# Altium PCB NCS_Wireless_Control_Card.PcbDoc
Units mm, origin at the board's own origin, x right, y up, seen from the top; angles counter-clockwise.
Board outline 68.5 x 80 mm, 2 copper layers (Top Layer, Bottom Layer), stack 1.6 mm thick; 49 components, 58 nets, 207 pads, 27 vias.
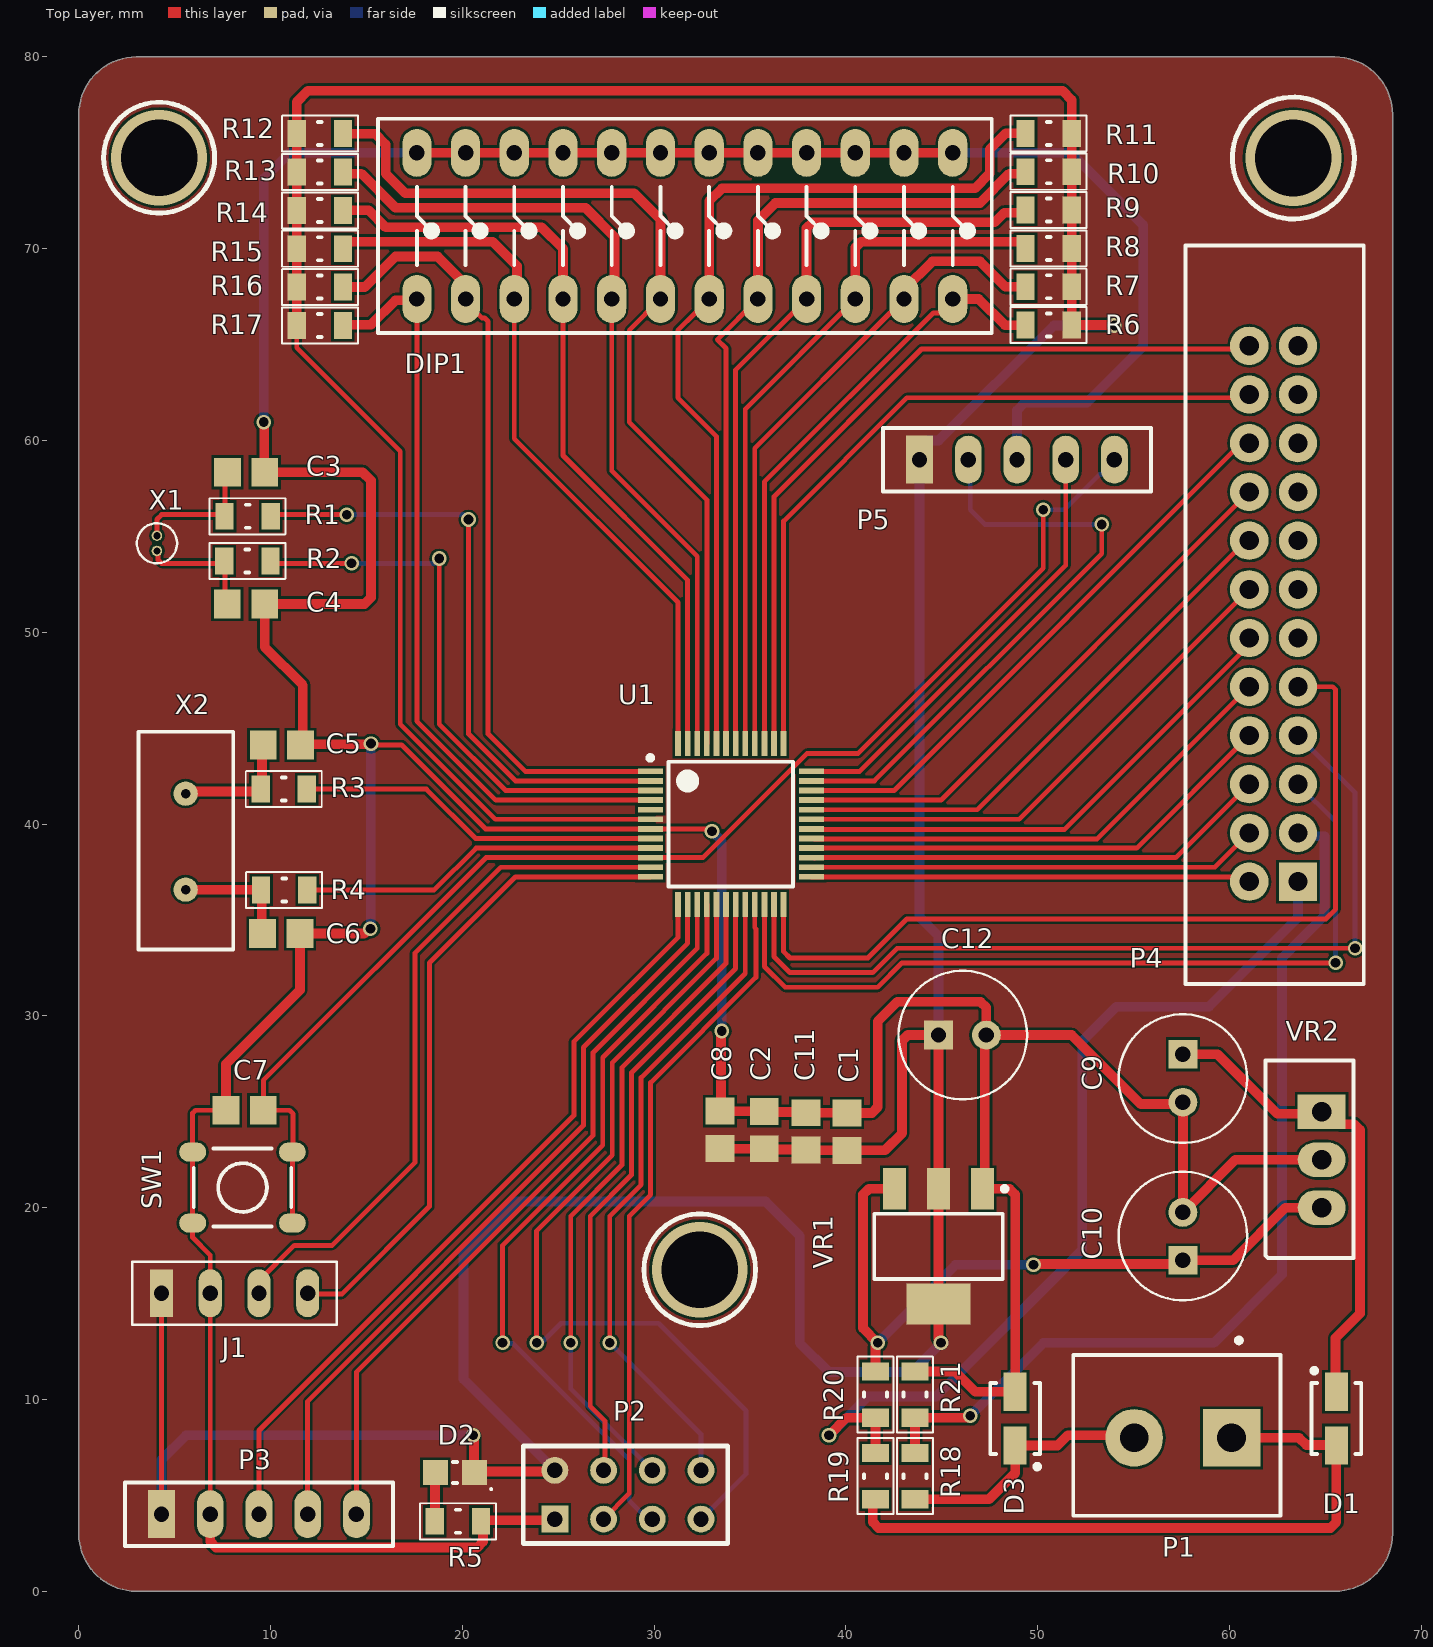
[diagram p0: Top Layer view]
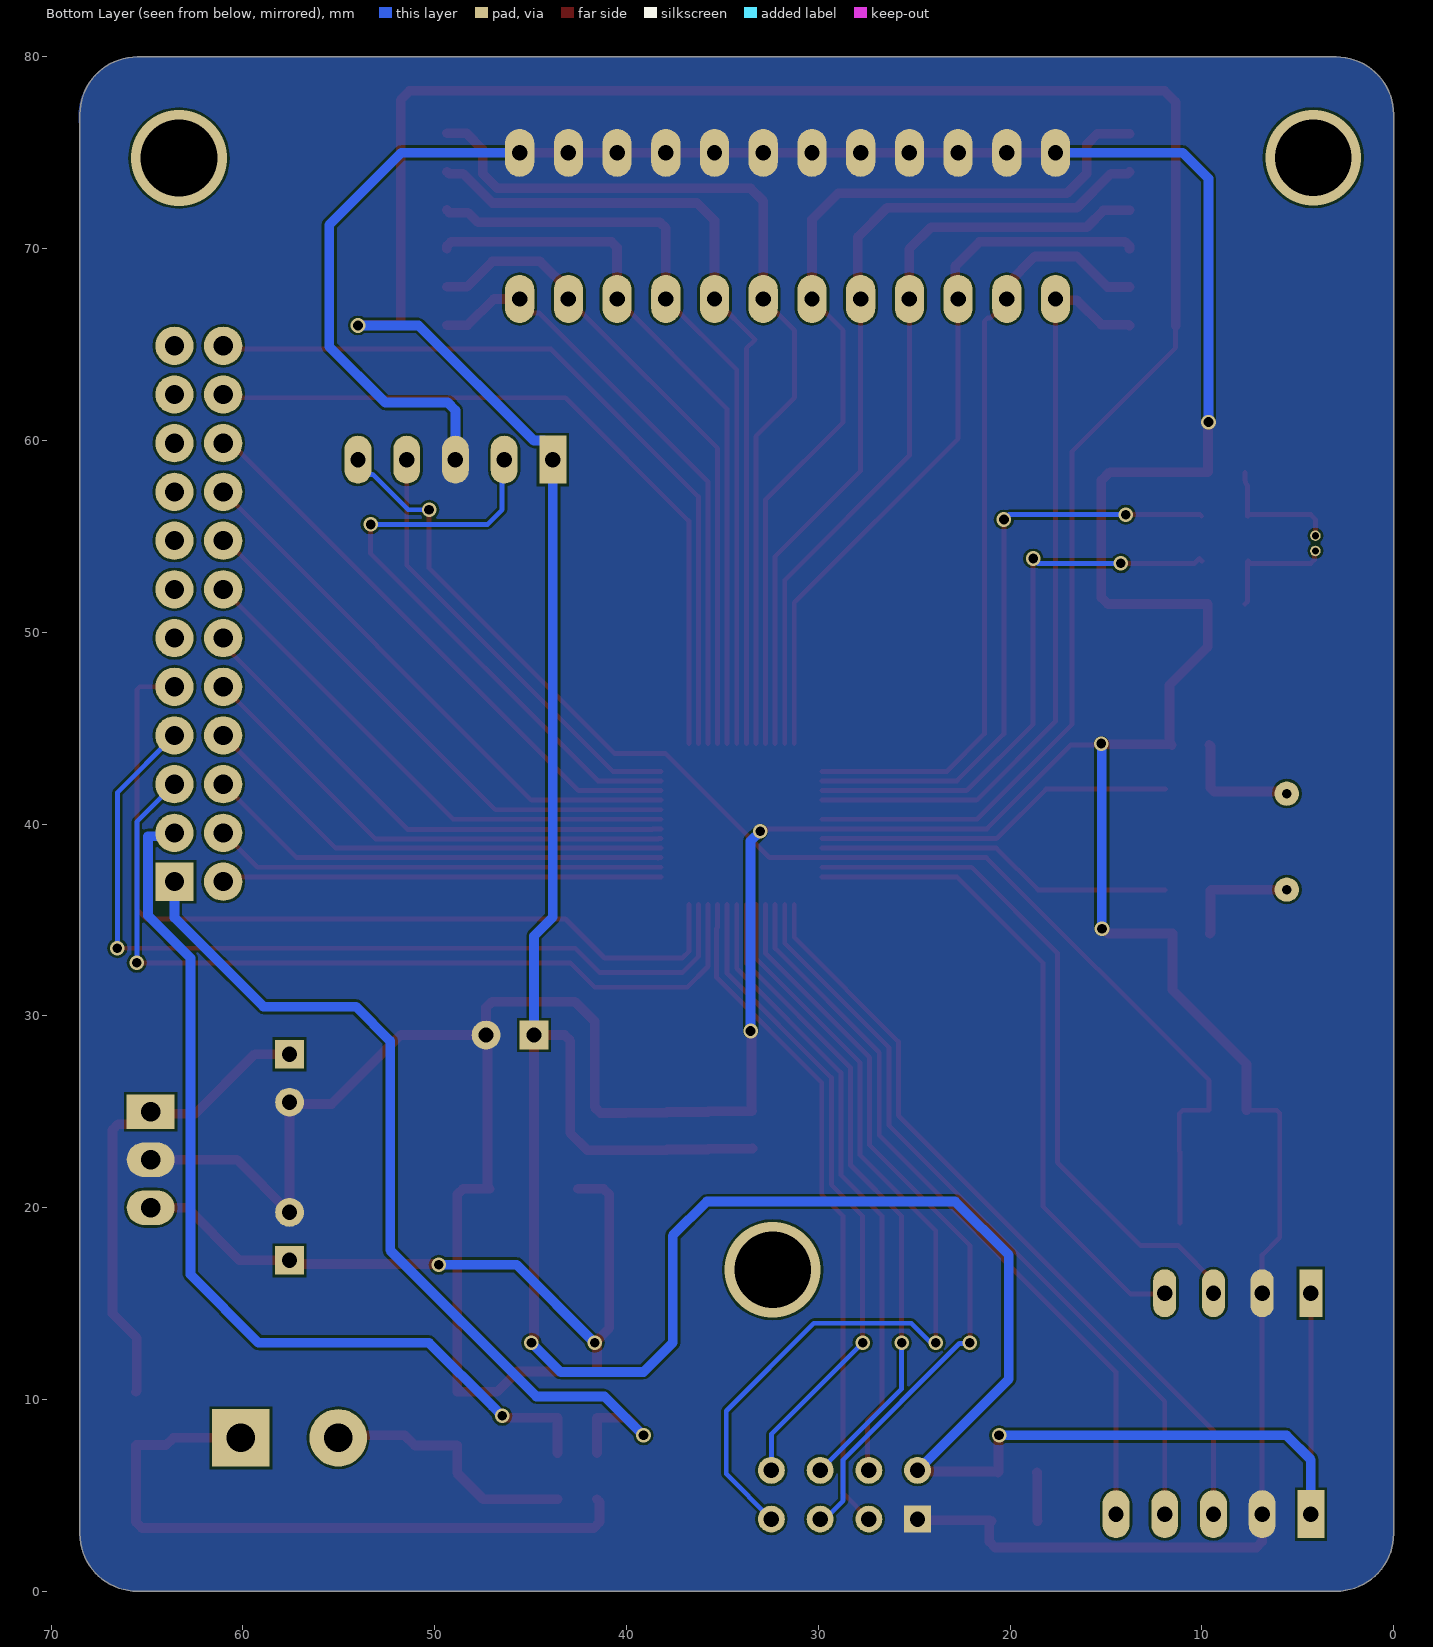
[diagram p1: Bottom Layer view, seen from below]
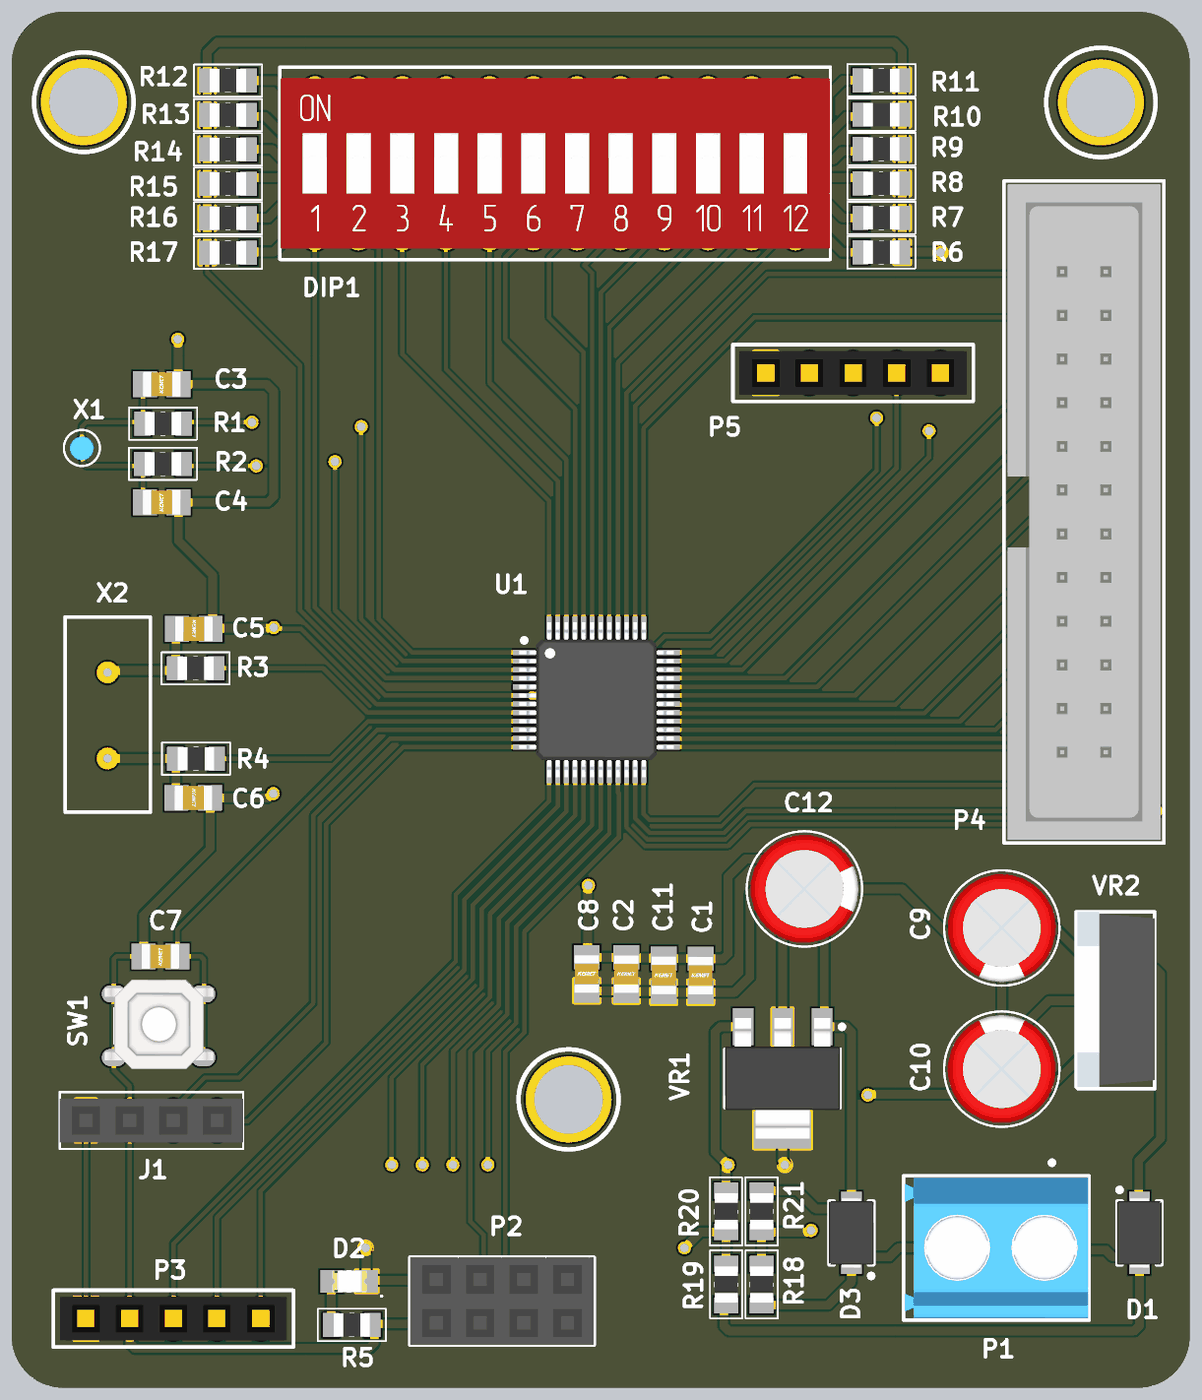
[diagram p2: 3D render of the assembled board from above, using the file's embedded part models]

## Layer stack, top to bottom
Top Solder: solder mask 0.0203, Solder Resist, Dk 3.5
Top Layer: signal copper 0.0508
Dielectric 1: dielectric 1.4986, FR-4, Dk 4.8
Bottom Layer: signal copper 0.0508
Bottom Solder: solder mask 0.0203, Solder Resist, Dk 3.5

## Board outline
0,3 0,77 cw(c3,77) 3,80 65.5,80 cw(c65.5,77) 68.5,77 68.5,3 cw(c65.5,3) 65.5,0 3,0 cw(c3,3)

## Design rules (kind name [scope] priority, off if disabled: settings)
Clearance [All] p1: gap=0.127 ignorepadtopadclearanceinfootprint=FALSE
HoleSize [All] p1: absolutevalues=TRUE maxlimit=100 minlimit=0.025 maxpercent=80.000 minpercent=20.000
MinimumSolderMaskSliver [All] p1: minsoldermaskwidth=0.025
PlaneConnect [All] p1: planeconnectstyle=Direct reliefexpansion=0.508 reliefentries=4 reliefconductorwidth=0.254 reliefairgap=0.254
PolygonConnect [All] p1: connectstyle=Direct reliefconductorwidth=0.254 reliefentries=4 polygonreliefangle="90 Angle" airgapwidth=0.254
RoutingVias [All] p1: holewidth=0.508 width=0.762 viastyle="Through Hole" minholewidth=0.254 minwidth=0.508 maxholewidth=100 maxwidth=100
SilkToSolderMaskClearance [IsPad] p1: minsilkscreentomaskgap=0.051 clearancetoexposedcopper=TRUE
SolderMaskExpansion [All] p1: expansion=0.102 istentingtop=FALSE
Width [All] p1: maxlimit=0.508 minlimit=0.254 preferedwidth=0.254
26 further rules are at their usual default settings.

## Classes and differential pairs
component class NCS_Wireless_Control_Card_Power_dis_conn: C8 C9 C10 C11 C12 D1 D2 D3 J1 P1 P2 R5 VR1 VR2
component class NCS_Wireless_Control_Card_MCU: C1 C2 C3 C4 C5 C6 C7 R1 R2 R3 R4 SW1 U1 X1 X2
component class NCS_Wireless_Control_Card_hc12_display_conn: DIP1 P3 P5 R6 R7 R8 R9 R10 R11 R12 R13 R14 R15 R16 R17
component class NCS_Wireless_Control_Card_Display_Connector: P4 R18 R19 R20 R21

## Components (designator, comment, footprint, x,y, rotation, side; value= is the part's Value field where it differs from the comment)
C1 "4.7uF" C0805C209D3HACTU_2pF 40.058,23.964 r270 top
C2 "100nF" C0805C104K3RACTU_100nF 35.74,24.044 r270 top
C3 "22pF" C0805C209D3HACTU_2pF 8.724,58.346 r0 top
C4 "22pF" C0805C209D3HACTU_2pF 8.72,51.48 r0 top
C5 "22pF" C0805C209D3HACTU_2pF 10.592,44.124 r180 top
C6 "22pF" C0805C209D3HACTU_2pF 10.56,34.296 r180 top
C7 "100nF" C0805C104K3RACTU_100nF 8.648,25.078 r0 top
C8 "4.7uF" C0805C209D3HACTU_2pF 33.436,24.058 r270 top
C9 "100uF 25V TH" "100uF 25V TH" 57.57,28 r270 top
C10 "220uF 25V TH" "100uF 25V TH" 57.57,17.254 r90 top
C11 "104pF" C0805C471K3RACTU_470pF 37.918,23.974 r270 top
C12 "100uF 25V TH" "100uF 25V TH" 44.824,29 r0 top
D1 "Diode" CRS06(TE85L,Q,M)_DIODE 65.57,9 r90 top
D2 "GREEN LED" LTST-C171GKT_GREEN 19.616,6.188 r180 top
D3 "Diode" CRS06(TE85L,Q,M)_DIODE 48.824,9 r270 top
DIP1 "12 DIP" DIP24 45.57,75 r270 top
J1 "1x4 Female Header" "1x4 Female Header" 4.316,15.538 r90 top
P1 "1x2 Connector" "1x2 Connector" 57.57,8 r270 top
P2 "2x4 header" "2x4 header" 24.824,3.762 r90 top
P3 "1x5 Female Header" "1x5 Female Header" 4.316,4.016 r90 top
P4 "2x12 Header" "2x12 header" 63.57,37 r180 top
P5 "1x5 Female Header" "1x5 Female Header" 43.84,59 r90 top
R1 "0R" RC0805FR-7W330RL 8.806,56.048 r0 top value=330R
R2 "0R" RC0805FR-7W330RL 8.792,53.716 r0 top value=330R
R3 "0R" RC0805FR-7W330RL 10.688,41.822 r180 top value=330R
R4 "0R" RC0805FR-7W330RL 10.712,36.57 r180 top value=330R
R5 "330R" RC0805FR-7W330RL 19.77,3.648 r180 top
R6 "4K7" RC0805FR-7W330RL 50.57,66.016 r0 top value=330R
R7 "4K7" RC0805FR-7W330RL 50.57,68.016 r0 top value=330R
R8 "4K7" RC0805FR-7W330RL 50.57,70.016 r0 top value=330R
R9 "4K7" RC0805FR-7W330RL 50.57,72.016 r0 top value=330R
R10 "4K7" RC0805FR-7W330RL 50.57,74.016 r0 top value=330R
R11 "4K7" RC0805FR-7W330RL 50.57,76.016 r0 top value=330R
R12 "4K7" RC0805FR-7W330RL 12.57,76 r180 top value=330R
R13 "4K7" RC0805FR-7W330RL 12.57,74 r180 top value=330R
R14 "4K7" RC0805FR-7W330RL 12.57,72 r180 top value=330R
R15 "4K7" RC0805FR-7W330RL 12.57,70 r180 top value=330R
R16 "4K7" RC0805FR-7W330RL 12.57,68 r180 top value=330R
R17 "4K7" RC0805FR-7W330RL 12.57,66 r180 top value=330R
R18 "0R" RC0805FR-7W330RL 43.602,6 r270 top value=330R
R19 "0R" RC0805FR-7W330RL 41.538,6 r270 top value=330R
R20 "0R" RC0805FR-7W330RL 41.538,10.254 r90 top value=330R
R21 "0R" RC0805FR-7W330RL 43.602,10.254 r90 top value=330R
SW1 "Push Button" "PUSH BUTTON SMD" 8.538,21.048 r0 top
U1 "STM32C031C6T6" STM32C031C6T6-48N 34,40 r0 top
VR1 "3v3 Voltage R" SAMS1117-33-4N 44.824,17.984 r270 top
VR2 "5V Vol Reg" "5V Vol Reg DIP" 64.808,25 r0 top
X1 "32.768Khz" 32.768KHz 4.078,54.24 r90 top
X2 "8Mhz" "8Mhz Crystal" 5.57,36.586 r90 top

## Footprints (in the part's own frame and the unit in brackets; to place one, negate y for a bottom-side part, rotate by r counter-clockwise, add the part's x,y. Pads: shape width x height; smd on the part's side, far side on the other; paste and mask are expansions set on the pad)
"1x2 Connector" [mm]
  rect 3x3 hole 1.5: 1(0,2.54)
  round 3 hole 1.5: 2(0,-2.54)
  silkscreen extent -5.21,-5.72 4.06,5.08, body extent -4.24,-5.63 3.96,5.03, height 10
"1x4 Female Header" [mm]
  rect 2.5x1.2 hole 0.8: 1(0,0)
  oval 2.5x1.2 hole 0.8: 2(0,-2.54) 3(0,-5.08) 4(0,-7.62)
  silkscreen extent -1.65,-9.14 1.65,1.52, body extent -1.27,-9.14 1.27,1.52, height 8.51
"1x5 Female Header" [mm]
  rect 2.5x1.4 hole 0.8: 1(0,0)
  oval 2.5x1.4 hole 0.8: 2(0,-2.54) 3(0,-5.08) 4(0,-7.62) 5(0,-10.16)
  silkscreen extent -1.65,-12.06 1.65,1.91, body extent -1.27,-11.68 1.27,1.52, height 8.5
"2x4 header" [mm]
  rect 1.4x1.4 hole 0.8: 1(0,0)
  round 1.4 hole 0.8: 2(2.54,0) 3(0,-2.54) 4(2.54,-2.54) 5(0,-5.08) 6(2.54,-5.08) 7(0,-7.62) 8(2.54,-7.62)
  silkscreen extent -1.27,-9.02 3.81,1.65, body extent -1.27,-9.02 3.81,1.65, height 8.51
"2x12 header" [mm]
  rect 2x2 hole 1: 1(0,0)
  round 2 hole 1: 2(0,-2.54) 3(0,-5.08) 4(0,-7.62) 5(0,-10.16) 6(0,-12.7) 7(0,-15.24) 8(0,-17.78) 9(0,-20.32) 10(0,-22.86) 11(0,-25.4) 12(0,-27.94) 13(2.54,-27.94) 14(2.54,-25.4) 15(2.54,-22.86) 16(2.54,-20.32) 17(2.54,-17.78) 18(2.54,-15.24) 19(2.54,-12.7) 20(2.54,-10.16) 21(2.54,-7.62) 22(2.54,-5.08) 23(2.54,-2.54) 24(2.54,0)
  silkscreen extent -3.43,-33.17 5.87,5.33, body extent -3.23,-32.97 5.66,5.13, height 8.63
"5V Vol Reg DIP" [mm]
  rect 2.5x1.8 hole 1: 1(0,0)
  oval 2.5x1.8 hole 1: 2(0,-2.5) 3(0,-5)
  silkscreen extent -2.92,-7.62 1.65,2.67, body extent -2.85,-7.51 1.65,2.69, height 19.21
"8Mhz Crystal" [mm]
  round 1.27 hole 0.5: 1(0,0) 2(5,0)
  silkscreen extent -3.12,-2.49 8.23,2.46, body extent -3.13,-2.5 8.22,2.5, height 3.68
32.768KHz [mm]
  round 0.55 hole 0.38: 1(0,0) 2(0.8,0)
  silkscreen extent -0.65,-1.05 1.45,1.04, body extent -0.32,-0.7 1.08,0.7, height 5
"100uF 25V TH" [mm]
  rect 1.5x1.5 hole 0.8: 1(0,0)
  round 1.5 hole 0.8: 2(2.5,0)
  silkscreen extent -2.08,-3.35 4.62,3.35, body extent -1.88,-3.15 4.41,3.15, height 10.89
C0805C104K3RACTU_100nF [mm]
  rect 1.4x1.5 smd: 1(-0.975,0) 2(0.975,0)
  body extent -1.1,-0.72 1.1,0.73, height 0.88
C0805C209D3HACTU_2pF [mm] "Chip Capacitor, 2-Leads, Body 2.50x1.35mm, IPC Medium Density"
  rect 1.4x1.5 smd: 1(-0.975,0) 2(0.975,0)
  body extent -1.1,-0.72 1.1,0.73, height 0.88
C0805C471K3RACTU_470pF [mm] "Chip Capacitor, 2-Leads, Body 2.50x1.35mm, IPC Medium Density"
  rect 1.4x1.5 smd: 1(-0.975,0) 2(0.975,0)
  body extent -1.1,-0.72 1.1,0.73, height 0.88
CRS06(TE85L,Q,M)_DIODE [mm] "Molded Diode, 2-Leads, Body 3.60x2.30mm, IPC Medium Density"
  rect 2x1.2 smd: 1(-1.4,0) 2(1.4,0)
  silkscreen extent -1.85,-1.3 2.62,1.3, body extent -2.07,-1.3 2.07,1.3, height 1.5
DIP24 [mm]
  oval 2.5x1.524 hole 0.8: 1(0,0) 2(0,-2.54) 3(0,-5.08) 4(0,-7.62) 5(0,-10.16) 6(0,-12.7) 7(0,-15.24) 8(0,-17.78) 9(0,-20.32) 10(0,-22.86) 11(0,-25.4) 12(0,-27.94) 13(7.62,-27.94) 14(7.62,-25.4) 15(7.62,-22.86) 16(7.62,-20.32) 17(7.62,-17.78) 18(7.62,-15.24) 19(7.62,-12.7) 20(7.62,-10.16) 21(7.62,-7.62) 22(7.62,-5.08) 23(7.62,-2.54) 24(7.62,0)
  silkscreen extent -1.78,-29.97 9.4,2.03, body extent -1.14,-29.94 8.76,2, height 6.8
LTST-C171GKT_GREEN [mm] "Chip Diode, 2-Leads, Body 2.50x1.15mm, IPC Medium Density"
  rect 1.3x1.3 smd: 1(-1.025,0) 2(1.025,0)
  silkscreen extent -1.94,-0.55 0.1,0.91, body extent -1.02,-0.63 0.98,0.63, height 0.8
"PUSH BUTTON SMD" [mm]
  oval 1.4x1 smd: 1(-2.6,1.85) 2(-2.6,-1.85) 3(2.6,-1.85) 4(2.6,1.85)
  silkscreen extent -2.54,-2.03 2.54,2.03, body extent -3.17,-2.52 3.23,2.68, height 3
RC0805FR-7W330RL [mm]
  rect 0.95x1.4 smd: 1(-1.204,0) 2(1.204,0)
  silkscreen extent -1.98,-0.94 1.98,0.94, body extent -1.05,-0.67 1.05,0.67, height 0.6
SAMS1117-33-4N [mm] "SOT223, 4-Leads, Body 6.50x7.00mm (avg), Pitch 2.30mm, IPC Medium Density"
  rect 2.15x1.2 smd: 1(-3,2.3) 2(-3,0) 3(-3,-2.3)
  rect 2.15x3.35 smd: 4(3,0)
  silkscreen extent -3.12,-3.35 1.7,3.58, body extent -3.5,-3.35 3.5,3.35, height 1.8
STM32C031C6T6-48N [mm] "TSQFP, 48-Leads, Body 7.30x7.30mm, Pitch 0.50mm, IPC Medium Density"
  rect 1.3x0.3 smd: 1(-4.2,2.75) 2(-4.2,2.25) 3(-4.2,1.75) 4(-4.2,1.25) 5(-4.2,0.75) 6(-4.2,0.25) 7(-4.2,-0.25) 8(-4.2,-0.75) 9(-4.2,-1.25) 10(-4.2,-1.75) 11(-4.2,-2.25) 12(-4.2,-2.75) 25(4.2,-2.75) 26(4.2,-2.25) 27(4.2,-1.75) 28(4.2,-1.25) 29(4.2,-0.75) 30(4.2,-0.25) 31(4.2,0.25) 32(4.2,0.75) 33(4.2,1.25) 34(4.2,1.75) 35(4.2,2.25) 36(4.2,2.75)
  rect 0.3x1.3 smd: 13(-2.75,-4.2) 14(-2.25,-4.2) 15(-1.75,-4.2) 16(-1.25,-4.2) 17(-0.75,-4.2) 18(-0.25,-4.2) 19(0.25,-4.2) 20(0.75,-4.2) 21(1.25,-4.2) 22(1.75,-4.2) 23(2.25,-4.2) 24(2.75,-4.2) 37(2.75,4.2) 38(2.25,4.2) 39(1.75,4.2) 40(1.25,4.2) 41(0.75,4.2) 42(0.25,4.2) 43(-0.25,4.2) 44(-0.75,4.2) 45(-1.25,4.2) 46(-1.75,4.2) 47(-2.25,4.2) 48(-2.75,4.2)
  silkscreen extent -4.32,-3.25 3.25,3.57, body extent -4.5,-4.5 4.5,4.5, height 1.6

## Part data
C1 C8: library part C0805C475K3PACTU, "Multilayer Ceramic Capacitor, 4.7 uF, 25 V, ï¿½ 10%, X5R, 0805 [2012 Metric]", Case Code (Imperial)=0805, Case Code (Metric)=2012, Dielectric=X5R, Manufacturer=KEMET, Max Operating Temperature=85°C, Min Operating Temperature=-55°C, Package Quantity=2500, Supplier Part Number=80-C0805C475K3P, Tolerance=10%, Voltage Rating (DC)=25V, Case/Package=0805, Category="Ceramic Capacitors", ComponentLink1Description=https://datasheet.ciiva.com/22748/1918694-22748309.pdf?src-supplier=Element14, ComponentLink1URL=https://datasheet.ciiva.com/22748/1918694-22748309.pdf?src-supplier=Element14, ComponentLink2Description=https://datasheet.ciiva.com/18193/getdatasheetpartid-195812-18193898.pdf?src-supplier=Verical, ComponentLink2URL=https://datasheet.ciiva.com/18193/getdatasheetpartid-195812-18193898.pdf?src-supplier=Verical, ComponentLink3Description=https://datasheet.ciiva.com/18193/getdatasheetpartid-385757-18193895.pdf?src-supplier=Verical, ComponentLink3URL=https://datasheet.ciiva.com/18193/getdatasheetpartid-385757-18193895.pdf?src-supplier=Verical, Construction=Flat, Depth=1.25mm, Dissipation Factor=5%, Height=1.25mm, Length=2mm, Manufacturer Part Number=C0805C475K3PACTU, Material=4241ConductorMaterial, Mounting Technology="Surface Mount,PCB", Packaging="Tape and Reel", Pins=2NUMBER, Pricing="1=0.28, 10=0.131, 50=0.131, 100=0.086, 1000=0.071, 10000=0.045 (USD)", Radiation Hardening=No, Reach SVHC Compliant=No, RoHS=Yes, RoHS Compliant=Yes, Series="SMD Comm X5R", Stock=222120, Supplier=Mouser, Termination=SMD/SMT, Thickness=1.397mm, Width=1.2mm
C2 C7: library part C0805C104K3RACTU, "Multilayer Ceramic Capacitor, 0.1 uF, 25 V, ï¿½ 10%, X7R, 0805 [2012 Metric]", Case Code (Imperial)=0805, Case Code (Metric)=2012, Dielectric=X7R, Manufacturer=KEMET, Max Operating Temperature=125°C, Min Operating Temperature=-55°C, Package Quantity=4000, Supplier Part Number=80-C0805C104K3R, Temperature Coefficient=30ppm/°C, Tolerance=10%, Voltage Rating=25V, Case/Package=0805, Category="Ceramic Capacitors", ComponentLink1Description=https://datasheet.ciiva.com/7842/kem-c1002-x7r-smd-7842536.pdf?src-supplier=Element14, ComponentLink1URL=https://datasheet.ciiva.com/7842/kem-c1002-x7r-smd-7842536.pdf?src-supplier=Element14, ComponentLink2Description=https://datasheet.ciiva.com/7842/kem-c1002-x7r-smd-7842538.pdf?src-supplier=Element14, ComponentLink2URL=https://datasheet.ciiva.com/7842/kem-c1002-x7r-smd-7842538.pdf?src-supplier=Element14, Construction=Flat, Depth=1.25mm, Height=0.9mm, Lead Free=5697LeadFree, Lead Pitch=0.75mm, Length=2mm, Manufacturer Part Number=C0805C104K3RACTU, Material=4241ConductorMaterial, Mounting Technology="Surface Mount,PCB", Packaging="Tape and Reel", Pins=2NUMBER, Pricing="1=0.1, 10=0.03, 50=0.03, 100=0.027, 1000=0.021, 10000=0.015 (USD)", Radiation Hardening=No, Reach SVHC Compliant=4186SVHC, RoHS=Yes, RoHS Compliant=Yes, Series="SMD Comm X7R", Stock=259681, Supplier=Mouser, Termination=SMD/SMT, Thickness=889um, Voltage Rating (DC)=25V, Width=1.2mm
C3 C4 C5 C6: library part C0805C209D3HACTU, "C0805C209D3HACTU_2pF", Manufacturer=KEMET, Supplier Part Number=80-C0805C209D3HACTU, Category=Capacitors, Manufacturer Part Number=C0805C209D3HACTU, Pricing="1=0.1, 10=0.032, 50=0.032, 100=0.02, 1000=0.015, 10000=0.01 (USD)", RoHS=Yes, RoHS Compliant=Yes, Stock=22626, Supplier=Mouser
C9 C10 C12: library part 860010473007, "WCAP-ATG8 Aluminum Electrolytic Capacitors", Leakage Current=25uA, Manufacturer="Wurth Electronics", Supplier Part Number 1=732-8630-1-ND, Voltage Rating (DC)=25V, Category="Aluminum Electrolytic Capacitors", ComponentLink1Description=https://datasheet.ciiva.com/48693/001280151-da-01-en-wcap-atg8-alu-elec-caps-860010473007-48693591.pdf?src-supplier=Conrad, ComponentLink1URL=https://datasheet.ciiva.com/48693/001280151-da-01-en-wcap-atg8-alu-elec-caps-860010473007-48693591.pdf?src-supplier=Conrad, Length=11mm, Manufacturer Part Number=860010473007, Pitch=2.5mm, Pricing 1="1=0.12, 50=0.1, 100=0.0873, 250=0.07832, 500=0.0675 (USD)", RoHS=Yes, Stock 1=10593, Supplier 1=Digikey
C11: library part C0805C471K3RACTU, "Capacitor, Ceramic, 470pF, 25VDC, 10-% Tol, 10+% Tol, X7R-TC Code, -15, 15%-TC RoHS Compliant: Yes", Manufacturer=KEMET, Supplier Part Number=80-C0805C471K3R, Category="Ceramic Capacitors", ComponentLink1Description=http://www.mouser.com/ds/2/212/KEM_C1002_X7R_SMD-1102033.pdf?src-supplier=Mouser, ComponentLink1URL=http://www.mouser.com/ds/2/212/KEM_C1002_X7R_SMD-1102033.pdf?src-supplier=Mouser, ComponentLink2Description=http://components.arrow.com/part/dataview/3447639S9184872N7429?src-supplier=Arrow+Electronics, ComponentLink2URL=http://components.arrow.com/part/dataview/3447639S9184872N7429?src-supplier=Arrow+Electronics, ComponentLink3Description=http://www.kemet.com/docfinder?Partnumber=C0805C471K3RACTU&src-supplier=Digikey, ComponentLink3URL=http://www.kemet.com/docfinder?Partnumber=C0805C471K3RACTU&src-supplier=Digikey, Manufacturer Part Number=C0805C471K3RACTU, Pricing="1=0.28, 10=0.127, 50=0.127, 100=0.076, 1000=0.064, 10000=0.05 (USD)", RoHS=Yes, Stock=4230, Supplier=Mouser
D1 D3: library part CRS06(TE85L,Q,M), "Diode Schottky 20V 1A 2-Pin S-FLAT T/R / DIODE SCHOTTKY 20V 1A SFLAT", Manufacturer=Toshiba, Supplier Part Number=CRS06QMCT-ND, Category="Rectifier Diodes", ComponentLink1Description=https://datasheet.ciiva.com/887/1764-887142.pdf?src-supplier=Digikey, ComponentLink1URL=https://datasheet.ciiva.com/887/1764-887142.pdf?src-supplier=Digikey, ComponentLink2Description=https://datasheet.ciiva.com/26868/getdatasheetpartid-564949-26868437.pdf?src-supplier=Verical, ComponentLink2URL=https://datasheet.ciiva.com/26868/getdatasheetpartid-564949-26868437.pdf?src-supplier=Verical, ComponentLink3Description=https://datasheet.ciiva.com/4715/1638-15026-4715604.pdf?src-supplier=Mouser, ComponentLink3URL=https://datasheet.ciiva.com/4715/1638-15026-4715604.pdf?src-supplier=Mouser, ComponentLink4Description=https://datasheet.ciiva.com/8290/crs06-datasheet-en-20131101-8290709.pdf?src-supplier=Avnet, ComponentLink4URL=https://datasheet.ciiva.com/8290/crs06-datasheet-en-20131101-8290709.pdf?src-supplier=Avnet, ComponentLink5Description=https://datasheet.ciiva.com/916/dst-crs06-tde-en-1638-916705.pdf?src-supplier=Digikey, ComponentLink5URL=https://datasheet.ciiva.com/916/dst-crs06-tde-en-1638-916705.pdf?src-supplier=Digikey, Manufacturer Part Number=CRS06(TE85L,Q,M), Pricing="1=0.41, 10=0.32, 100=0.2283, 500=0.17242, 1000=0.15438 (USD)", RoHS=Yes, Stock=4733, Supplier=Digikey
D2: library part LTST-C171GKT, "LED Low-Power Uni-Color Green 565nm 2.1V 2-Pin Chip LED T/R", Case Code (Imperial)=0805, Case Code (Metric)=2012, Color=Green, Forward Current=30mA, Forward Voltage=2.1V, Lens Color=Colorless, Manufacturer="Vishay Lite-On", Max Operating Temperature=85°C, Min Operating Temperature=-55°C, Package Quantity=3000, Power Dissipation=100mW, Reverse Voltage=5V, Supplier Part Number=160-1423-1-ND, Test Current=10mA, Case/Package=0805, Category=LEDs, ComponentLink1Description=https://datasheet.ciiva.com/2110/ltst-c171gkt-2110000.pdf?src-supplier=Digikey, ComponentLink1URL=https://datasheet.ciiva.com/2110/ltst-c171gkt-2110000.pdf?src-supplier=Digikey, ComponentLink2Description=https://datasheet.ciiva.com/11773/0900766b80dc0296-11773991.pdf?src-supplier=Rs, ComponentLink2URL=https://datasheet.ciiva.com/11773/0900766b80dc0296-11773991.pdf?src-supplier=Rs, ComponentLink3Description=https://datasheet.ciiva.com/12400/lite-on-ltst-c171gkt-190133-12400647.pdf?src-supplier=Mouser, ComponentLink3URL=https://datasheet.ciiva.com/12400/lite-on-ltst-c171gkt-190133-12400647.pdf?src-supplier=Mouser, ComponentLink4Description=https://datasheet.ciiva.com/2110/ltst-c171gkt-2110001.pdf?src-supplier=Digikey, ComponentLink4URL=https://datasheet.ciiva.com/2110/ltst-c171gkt-2110001.pdf?src-supplier=Digikey, ComponentLink5Description=https://datasheet.ciiva.com/2110/ltst-c171gkt-2110002.pdf?src-supplier=Digikey, ComponentLink5URL=https://datasheet.ciiva.com/2110/ltst-c171gkt-2110002.pdf?src-supplier=Digikey, ComponentLink6Description=https://datasheet.ciiva.com/16396/ltst-c171gkt-16396549.pdf?src-supplier=Future+Electronics, ComponentLink6URL=https://datasheet.ciiva.com/16396/ltst-c171gkt-16396549.pdf?src-supplier=Future+Electronics, Depth=1.25mm, Dominant Wavelength=569nm, Height=0.9mm, Illumination Color=Green, Lead Free="Lead Free", Length=2mm, Lens Size=1.25mm, Lens Style=Flat,Diffused,Colorless,Rectangular,Clear, Lens Transparency=Clear, Luminous Intensity=12mcd, Manufacturer Part Number=LTST-C171GKT, Mounting Technology="Surface Mount", Number of Elements=1, Number of LEDs=1, Packaging="Tape and Reel", Pins=2, Power Rating=100mW, Pricing="1=0.22, 10=0.121, 100=0.0725, 500=0.0536, 1000=0.04781 (USD)", Radiation Hardening=No, RoHS=Yes, RoHS Compliant=Yes, Series=-, Stock=490267, Supplier=Digikey, Viewing Angle=130°, Wavelength=565nm, Width=1.25mm
DIP1: library part "12 Way 2.54MM DIP switch - SUNROM"
J1: library part PPPC041LFBN-RC, "Female, 4 C, Straight, .100\"CC; 3.20mm Tail, No Mounting; PBT, Phos. Bronze, 105 C", Manufacturer=Sullins, Supplier Part Number 1=S7037-ND, Category=Connectors, ComponentLink1Description=https://media.digikey.com/pdf/Data%20Sheets/Sullins%20PDFs/Female_Headers.100_DS.pdf?src-supplier=Digikey, ComponentLink1URL=https://media.digikey.com/pdf/Data%20Sheets/Sullins%20PDFs/Female_Headers.100_DS.pdf?src-supplier=Digikey, ComponentLink2Description=http://www.sullinscorp.com/catalogs/78_Page80-81_HEADER_.100_2.54mm_FEMALE.pdf?src-supplier=Future+Electronics, ComponentLink2URL=http://www.sullinscorp.com/catalogs/78_Page80-81_HEADER_.100_2.54mm_FEMALE.pdf?src-supplier=Future+Electronics, ComponentLink3Description=https://datasheet.octopart.com/PPPC041LFBN-RC-Sullins-datasheet-41308905.pdf?src-supplier=Future+Electronics, ComponentLink3URL=https://datasheet.octopart.com/PPPC041LFBN-RC-Sullins-datasheet-41308905.pdf?src-supplier=Future+Electronics, Contact Material=150ConductorMaterial, Height=8.5mm, Housing Material=4239ConductorMaterial, Lead Free=5697LeadFree, Length=10.7mm, Manufacturer Part Number=PPPC041LFBN-RC, Pricing 1="1=0.42, 10=0.338, 100=0.2755, 500=0.23884, 1000=0.2246, 5000=0.2106 (USD)", RoHS=Yes, Stock 1=15423, Supplier 1=Digikey, Width=2.5mm
P1: library part TB006-508-02BE, "2~24 Poles, Screw Type, Horizontal, 5.08 Pitch, 26~14 (AWG), Terminal Block Connector", Manufacturer=CUI, Supplier Part Number=9117522, Manufacturer Part Number=TB006-508-02BE, RoHS=Yes, Supplier="Future Electronics"
P2: library part PPTC042LFBN-RC, "Header Connector, Pcb Mnt, 8 Contacts, Skt, 0.1 Pitch, Pc Tail Terminal, Locking", Current Rating=3A, Manufacturer=Sullins, Supplier Part Number=S7072-ND, Category="Headers and Wire Housings", ComponentLink1Description=https://media.digikey.com/pdf/Data%20Sheets/Sullins%20PDFs/Female_Headers.100_DS.pdf?src-supplier=Digikey, ComponentLink1URL=https://media.digikey.com/pdf/Data%20Sheets/Sullins%20PDFs/Female_Headers.100_DS.pdf?src-supplier=Digikey, ComponentLink2Description=https://datasheet.octopart.com/PPTC042LFBN-RC-Sullins-datasheet-83216130.pdf?src-supplier=Future+Electronics, ComponentLink2URL=https://datasheet.octopart.com/PPTC042LFBN-RC-Sullins-datasheet-83216130.pdf?src-supplier=Future+Electronics, Contact Material=150,153,154ConductorMaterial, Height=8.5mm, Housing Material=4239ConductorMaterial, Lead Free=5697LeadFree, Length=10.7mm, Manufacturer Part Number=PPTC042LFBN-RC, Number of Contacts=8NUMBER, Pricing="1=0.63, 10=0.514, 80=0.427, 440=0.36705, 1000=0.34128, 5000=0.3328 (USD)", RoHS=Yes, Stock=8036, Supplier=Digikey, Width=5mm
P3 P5: library part M20-9990546, "2.54mm (0.1) Pitch SIL Vertical PC Tail Pin Header, 6.1mm mating pin height, tin, 5 contacts\"", Case/Package=SIL, Current Rating=3A, Flammability Rating="UL94 V-0", Insulation Color=Black, Insulation Resistance=10GR, Manufacturer=Harwin, Max Operating Temperature=105°C, Min Operating Temperature=-40°C, Package Quantity=1000, Supplier Part Number=952-2268-ND, Voltage Rating (DC)=750V, Category="Headers and Wire Housings", ComponentLink1Description=https://datasheet.ciiva.com/11749/0900766b80da602d-11749062.pdf?src-supplier=Rs, ComponentLink1URL=https://datasheet.ciiva.com/11749/0900766b80da602d-11749062.pdf?src-supplier=Rs, ComponentLink2Description=https://datasheet.ciiva.com/6833/m20-999-6833320.pdf?src-supplier=Digikey, ComponentLink2URL=https://datasheet.ciiva.com/6833/m20-999-6833320.pdf?src-supplier=Digikey, ComponentLink3Description=https://datasheet.ciiva.com/8046/315376-8046940.pdf?src-supplier=Element14, ComponentLink3URL=https://datasheet.ciiva.com/8046/315376-8046940.pdf?src-supplier=Element14, Contact Finish - Mating=TIN, Contact Material=Brass,Bronze, Contact Plating=Tin, Contact Shape=Square, Contact Type="Male Pin", Fastening Type=Pull, Gender=Male, Insulation Material=Nylon, Manufacturer Part Number=M20-9990546, Mated Stacking Heights=16.54mm, Mounting Technology="Through Hole", Number of Contacts=5, Number of Positions=5, Number of Rows=1, Orientation=Straight, Packaging=Bulk, Pitch=2.54mm, Pricing="1=0.2, 10=0.163, 100=0.1329, 500=0.11516, 1000=0.10828, 5000=0.09388, 10000=0.08828 (USD)", Reach SVHC Compliant=No, RoHS=Yes, RoHS Compliant=Yes, Series=M20, Stock=16218, Supplier=Digikey, Termination=Solder
P4: library part 0702462401, "2.54mm Pitch C-Grid Header Low Profile Dual Row Vertical Shrouded 24 Circuits 0.38", Manufacturer=Molex, Supplier Part Number=538-70246-2401, ComponentLink1Description=https://datasheet.ciiva.com/9470/0702462401-pcb-headers-9470294.pdf?src-supplier=Avnet, ComponentLink1URL=https://datasheet.ciiva.com/9470/0702462401-pcb-headers-9470294.pdf?src-supplier=Avnet, Manufacturer Part Number=0702462401, Pricing="1=2.2, 10=1.67, 50=1.67, 100=1.31, 1000=1.31, 10000=1.29 (USD)", RoHS=Yes, Stock=1024, Supplier=Mouser
R1 R2 R3 R4 R5 R6 R7 R8 R9 R10 R11 R12 R13 R14 R15 R16 R17 R18 R19 R20 R21: library part RC0805FR-7W330RL, "Res Thick Film 0805 330 Ohm 1% 0.25W(1/4W) ±200ppm/C Pad SMD T/R", Case/Package=339Case, Manufacturer=Yageo, Supplier Part Number=13-RC0805FR-7W330RLCT-ND, Category="Chip SMD Resistors", Manufacturer Part Number=RC0805FR-7W330RL, Packaging=10Packaging, Pricing="1=0.17, 10=0.057, 50=0.046, 100=0.0347, 500=0.03264, 1000=0.0306 (USD)", RoHS=Yes, Stock=5595, Supplier=Digikey
SW1: library part "Tactile Switch SMD 4P 5.2x5.2x1.5mm - EVELTA"
U1: "RISC Microcontroller, 32-Bit, FLASH, CORTEX-M4F CPU, 180MHz, CMOS, PBGA216", Manufacturer=STMicroelectronics, Supplier Part Number 1=511-STM32C031C6T6, Category=Microcontrollers, ComponentLink1Description=https://datasheet.octopart.com/STM32C031C6T6-STMicroelectronics-datasheet-168218616.pdf?src-supplier=TME, ComponentLink1URL=https://datasheet.octopart.com/STM32C031C6T6-STMicroelectronics-datasheet-168218616.pdf?src-supplier=TME, Manufacturer Part Number=STM32C031C6T6, Pricing 1="1=2.39, 10=1.53, 50=1.36, 100=1.12, 1000=0.78, 10000=0.629 (USD)", RoHS=No, Stock 1=900, Supplier 1=Mouser
VR1: library part AMS1117-33-3.3V
VR2: library part L7805CV, "Voltage Regulator; linear; fixed; Vout: 5V; Vin: 7-35V; Vd: 2V; 2%; 1A; 0+150 deg.C; THT; TO220", Case/Package=TO-220, Dropout Voltage=2V, Manufacturer=STMicroelectronics, Max Input Voltage=35V, Max Operating Temperature=125°C, Max Output Current=1.5A, Min Input Voltage=7V, Min Operating Temperature=-40°C, Min Output Voltage=4.65V, Nominal Output Voltage=5V, Power Supply Rejection Ratio (PSRR)=62dB, Quiescent Current=8mA, Supplier Part Number 1=511-L7805CV, Tolerance=5%, Category="Voltage Regulators - Linear", ComponentLink1Description=https://datasheet.ciiva.com/29156/156048-da-01-en-spannungsregler-l-7805-cv-to220-stm-29156924.pdf?src-supplier=Conrad, ComponentLink1URL=https://datasheet.ciiva.com/29156/156048-da-01-en-spannungsregler-l-7805-cv-to220-stm-29156924.pdf?src-supplier=Conrad, ComponentLink2Description=https://datasheet.ciiva.com/6884/1805459-6884463.pdf?src-supplier=Newark, ComponentLink2URL=https://datasheet.ciiva.com/6884/1805459-6884463.pdf?src-supplier=Newark, ComponentLink3Description=https://datasheet.ciiva.com/2073/cd00000444-2073087.pdf?src-supplier=Digikey, ComponentLink3URL=https://datasheet.ciiva.com/2073/cd00000444-2073087.pdf?src-supplier=Digikey, ComponentLink4Description=https://datasheet.ciiva.com/16458/cd00000444-16458159.pdf?src-supplier=Future+Electronics, ComponentLink4URL=https://datasheet.ciiva.com/16458/cd00000444-16458159.pdf?src-supplier=Future+Electronics, Contact Plating=Gold, Height=9.15mm, Lead Free="Lead Free", Length=10.4mm, Manufacturer Part Number=L7805CV, Mount="Through Hole", Number of Channels=1, Number of Outputs=1, Number of Pins=3, Number of Regulators=1, Output Current=1.5A, Output Type=Fixed, Output Voltage=5V, Polarity=Positive, Pricing 1="1=0.5, 10=0.294, 50=0.294, 100=0.255, 1000=0.233, 10000=0.203 (USD)", Radiation Hardening=No, Reach SVHC Compliant=No, RoHS=No, Stock 1=45531, Supplier 1=Mouser, Weight=2.299997g, Width=4.6mm
X1: library part "32.768 Khz RTC Crystal T38-SUNROM"
X2: library part "8 Mhz Crystal HC-49US-SUNROM"

## Via types
v1: diameter 0.762, hole 0.508, Top Layer to Bottom Layer, 24 vias
v2: diameter 5, hole 4, Top Layer to Bottom Layer, 3 vias

## Nets (pads, with @x,y where several pads share a name; then routed paths per layer and width w, separated by ;. In a path a pad name is that pad's centre, name@x,y a point inside that pad or via, vN(x,y) a via of type N, cw(c..) or ccw(c..) an arc to the next point about the centre after c; other vN are vias at no path point)
+5: C10.1 R20.2 VR1.3 VR2.3 | length 37.4
  Top Layer w0.508: R20.2 41.538,12.767 41.656,12.885 v1(41.656,12.954) 40.894,13.716 40.894,20.686 41.192,20.984 VR1.3 ; v1(49.784,17.018) 49.833,17.067 57.382,17.067 C10.1 60.18,17.254 62.926,20 VR2.3
  Bottom Layer w0.508: v1(41.656,12.954) 45.72,17.018 v1(49.784,17.018)
+12V: D1.1 P1.1 R19.2 | length 35.3
  Top Layer w0.508: R19.2 41.402,4.66 41.402,3.6 41.7,3.302 65.272,3.302 65.57,3.6 D1.1 65.55,7.62 64.008,7.62 63.628,8 P1.1
AGND: D3.2 P1.2 R18.2 | length 13.7
  Top Layer w0.508: R18.2 47.468,4.796 48.824,6.152 D3.2 51.034,7.6 51.562,8.128 54.902,8.128 P1.2
BGND: C1.1 C2.1 C3.2 C4.2 C5.1 C6.1 C7.1 C8.1 C9.2 C10.2 C11.1 C12.2 D3.1 DIP1.1 DIP1.2 DIP1.3 DIP1.4 DIP1.5 DIP1.6 DIP1.7 DIP1.8 DIP1.9 DIP1.10 DIP1.11 DIP1.12 J1.2 P2.1 P3.2 P5.3 R5.1 R21.2 SW1.1 SW1.2 U1.7 VR1.1 VR2.2 | length 288.2
  Top Layer w0.254: P3.2 J1.2 6.858,15.54 6.858,17.526 5.938,18.446 SW1.2 SW1.1 5.938,24.929 6.087,25.078 C7.1 ; C5.1 16.836,44.124 21.21,39.75 U1.7 32.757,39.75 32.853,39.654 v1@32.99,39.654
  Top Layer w0.508: P3.2 6.856,2.584 7.154,2.286 20.784,2.286 21.082,2.584 21.082,3.54 R5.1 21.031,3.705 24.767,3.705 P2.1 ; C7.1 7.673,27.485 11.535,31.347 C6.1 14.889,34.296 15.137,34.544 v1(15.206,34.544) ; v1(9.652,60.96) 9.676,60.936 9.676,58.37 C3.2 14.806,58.346 15.24,57.912 15.24,51.816 14.904,51.48 C4.2 9.695,49.233 11.684,47.244 11.684,44.241 C5.1@11.603,44.16 ; C5.1 C5.1@11.603,44.16 ; v1(15.24,44.196) 15.204,44.16 C5.1@11.603,44.16 ; DIP1.12 DIP1.11 DIP1.10 DIP1.9 DIP1.8 DIP1.7 DIP1.6 DIP1.5 DIP1.4 DIP1.3 DIP1.2 DIP1.1 ; v1(33.528,29.21) 33.482,29.164 33.482,25.065 33.443,25.026 35.733,25.026 C2.1 35.775,24.984 37.883,24.984 C11.1 37.923,24.944 40.053,24.944 C1.1 41.358,24.939 41.656,25.236 41.656,29.718 42.672,30.734 47.026,30.734 47.324,30.436 C12.2 ; R21.2 45.692,11.458 46.75,10.4 D3.1 48.824,20.686 48.526,20.984 VR1.1 47.244,21.104 47.244,28.652 47.324,28.732 C12.2 ; VR2.2 60.316,22.5 C10.2 C9.2 57.47,25.4 55.372,25.4 51.772,29 C12.2
  Bottom Layer w0.508: v1(9.652,60.96) 9.652,73.66 10.992,75 DIP1.12 ; v1(15.206,34.544) 15.223,34.561 15.223,44.179 v1(15.24,44.196) ; v1(33.02,39.624) 33.528,39.116 v1(33.528,29.21) ; DIP1.1 51.746,75 55.5,71.246 55.5,64.898 52.578,61.976 49.32,61.976 48.92,61.576 P5.3
NetC3_1: C3.1 R1.1 X1.2 | length 6.9
  Top Layer w0.254: X1.2 4.078,55.894 4.318,56.134 7.516,56.134 R1.1 7.62,56.066 7.62,57.658 ccw(c7.308,57.97) 7.749,57.97 C3.1
NetC4_1: C4.1 R2.1 X1.1 | length 6.4
  Top Layer w0.254: X1.1 4.135,54.183 4.135,53.777 4.318,53.594 7.466,53.594 R2.1 7.62,53.684 7.62,51.605 C4.1
NetC5_2: C5.2 R3.2 X2.2 | length 6.4
  Top Layer w0.508: X2.2 5.688,41.704 9.366,41.704 R3.2 9.55,41.888 9.55,44.057 C5.2
NetC6_2: C6.2 R4.2 X2.1 | length 6.3
  Top Layer w0.508: X2.1 5.578,36.578 9.5,36.578 R4.2 9.546,36.531 9.546,34.334 C6.2
NetC7_2: C7.2 P5.5 SW1.3 SW1.4 U1.10 | length 68.6
  Top Layer w0.254: SW1.3 SW1.4 11.176,22.936 11.176,24.892 10.99,25.078 C7.2 9.623,26.641 21.232,38.25 U1.10 32.544,38.25 33.655,39.361 33.655,39.364 37.979,43.688 40.64,43.688 50.292,53.34 v1(50.292,56.388)
  Bottom Layer w0.254: v1(50.292,56.388) 51.388,56.388 53.231,58.231 53.471,58.231 54,58.76 P5.5
NetC9_1: C9.1 D1.2 VR2.1 | length 24.9
  Top Layer w0.508: C9.1 59.385,28 62.493,24.892 64.7,24.892 VR2.1 ; VR2.1@65.062,25 65.708,24.354 66.504,24.354 66.802,24.056 66.802,14.478 65.532,13.208 65.532,10.438 D1.2
NetD2_2: D2.2 R5.2 | length 2.6
  Top Layer w0.508: R5.2 18.578,3.66 18.578,6.175 D2.2
NetDIP1_13: DIP1.13 R17.1 U1.4 | length 40.3
  Top Layer w0.254: DIP1.13 17.63,45.362 21.742,41.25 U1.4
  Top Layer w0.508: R17.1 13.814,66.04 15.24,66.04 16.51,67.31 17.56,67.31 DIP1.13
NetDIP1_14: DIP1.14 R16.1 U1.1 | length 40.9
  Top Layer w0.254: DIP1.14 20.17,67.236 21.012,66.394 21.156,66.394 21.336,66.214 21.336,44.704 23.29,42.75 U1.1
  Top Layer w0.508: R16.1 14.914,68 16.51,69.596 18.717,69.596 20.17,68.143 DIP1.14
NetDIP1_15: DIP1.15 R15.1 U1.48 | length 38.3
  Top Layer w0.254: DIP1.15 22.71,60.094 31.25,51.554 U1.48
  Top Layer w0.508: R15.1 13.774,70.137 13.995,70.358 21.59,70.358 22.854,69.094 22.854,67.524 DIP1.15
NetDIP1_16: DIP1.16 R14.1 U1.47 | length 40.8
  Top Layer w0.254: DIP1.16 25.25,59.218 31.75,52.718 U1.47
  Top Layer w0.508: R14.1 15.122,72 16.002,71.12 24.13,71.12 25.25,70 DIP1.16
NetDIP1_17: DIP1.17 R13.1 U1.46 | length 43.9
  Top Layer w0.254: DIP1.17 27.79,58.42 32.25,53.96 U1.46
  Top Layer w0.508: R13.1 13.86,73.914 14.732,73.914 16.51,72.136 26.416,72.136 27.94,70.612 27.94,67.53 DIP1.17
NetDIP1_18: DIP1.18 R12.1 U1.45 | length 49
  Top Layer w0.254: DIP1.18 28.702,65.752 28.702,60.96 32.75,56.912 U1.45
  Top Layer w0.508: R12.1 15.44,76 16.002,75.438 16.002,73.914 17.018,72.898 28.956,72.898 30.33,71.524 DIP1.18
NetDIP1_19: DIP1.19 R11.1 U1.44 | length 48.6
  Top Layer w0.254: DIP1.19 32.87,67.236 32.283,66.649 32.139,66.649 31.242,65.752 31.242,62.23 33.25,60.222 U1.44
  Top Layer w0.508: DIP1.19 32.87,72.494 33.528,73.152 46.736,73.152 47.498,73.914 47.498,75.184 48.33,76.016 R11.1
NetDIP1_20: DIP1.20 R10.1 U1.43 | length 43.4
  Top Layer w0.254: U1.43 33.75,64.802 33.291,65.261 DIP1.20
  Top Layer w0.508: DIP1.20 35.41,71.478 36.322,72.39 46.99,72.39 48.514,73.914 49.264,73.914 R10.1
NetDIP1_21: DIP1.21 R9.1 U1.42 | length 40.2
  Top Layer w0.254: U1.42 34.25,63.68 DIP1.21
  Top Layer w0.508: DIP1.21 37.95,71.076 38.248,71.374 47.752,71.374 48.26,71.882 49.232,71.882 R9.1
NetDIP1_22: DIP1.22 R8.1 U1.41 | length 37.4
  Top Layer w0.254: U1.41 34.75,61.64 DIP1.22
  Top Layer w0.508: DIP1.22 40.49,70.06 40.788,70.358 49.145,70.358 49.366,70.137 R8.1
NetDIP1_23: DIP1.23 R7.1 U1.40 | length 34.5
  Top Layer w0.254: U1.40 35.25,59.6 42.299,66.649 42.443,66.649 43.03,67.236 DIP1.23
  Top Layer w0.508: DIP1.23 43.03,67.868 44.504,69.342 46.99,69.342 48.316,68.016 R7.1
NetDIP1_24: DIP1.24 R6.1 U1.39 | length 31.9
  Top Layer w0.254: U1.39 35.75,57.848 44.551,66.649 44.983,66.649 45.57,67.236 DIP1.24
  Top Layer w0.508: DIP1.24 46.92,67.38 48.284,66.016 R6.1
NetJ1_3: J1.3 U1.11 | length 36.4
  Top Layer w0.254: J1.3 9.396,16.188 11.242,18.034 13.208,18.034 17.526,22.352 17.526,33.274 22.002,37.75 U1.11
NetJ1_4: J1.4 U1.12 | length 34.3
  Top Layer w0.254: J1.4 11.98,15.494 13.716,15.494 18.288,20.066 18.288,32.766 22.772,37.25 U1.12
NetP2_3: P2.3 U1.21 | length 35.4
  Top Layer w0.254: P2.3 28.702,5.1 28.702,19.558 29.82,20.676 29.82,26.518 35.306,32.004 35.306,34.544 35.25,34.6 U1.21
NetP2_4: P2.4 U1.19 | length 33
  Top Layer w0.254: P2.4 27.432,6.37 27.432,8.89 26.67,9.652 26.67,19.558 28.82,21.708 28.82,27.042 34.25,32.472 U1.19
NetP2_5: P2.5 U1.16 | length 40.1
  Top Layer w0.254: v1(22.098,12.954) 22.098,18.034 27.32,23.256 27.32,27.828 32.75,33.258 U1.16
  Bottom Layer w0.254: v1(22.098,12.954) 22.129,12.923 22.637,12.923 28.702,6.858 28.702,4.721 29.661,3.762 P2.5
NetP2_6: P2.6 U1.18 | length 34.6
  Top Layer w0.254: v1(25.654,12.954) 25.654,19.558 28.32,22.224 28.32,27.304 33.75,32.734 U1.18
  Bottom Layer w0.254: v1(25.654,12.954) 25.654,10.552 P2.6
NetP2_7: P2.7 U1.17 | length 46.6
  Top Layer w0.254: v1(23.876,12.954) 23.876,18.796 27.82,22.74 27.82,27.566 33.25,32.996 U1.17
  Bottom Layer w0.254: v1(23.876,12.954) 24.13,12.954 25.146,13.97 30.226,13.97 34.798,9.398 34.798,6.116 P2.7
NetP2_8: P2.8 U1.20 | length 34.4
  Top Layer w0.254: v1(27.686,12.954) 27.686,19.558 29.32,21.192 29.32,26.78 34.75,32.21 U1.20
  Bottom Layer w0.254: v1(27.686,12.954) 32.444,8.196 P2.8
NetP3_3: P3.3 U1.13 | length 40.8
  Top Layer w0.254: P3.3 9.396,8.38 25.82,24.804 25.82,28.66 31.25,34.09 U1.13
NetP3_4: P3.4 U1.14 | length 40
  Top Layer w0.254: P3.4 11.936,9.904 26.32,24.288 26.32,28.359 31.75,33.789 U1.14
NetP3_5: P3.5 U1.15 | length 39.1
  Top Layer w0.254: P3.5 14.476,11.428 26.82,23.772 26.82,28.09 32.25,33.52 U1.15
NetP4_1: P4.1 R19.1 R20.1 | length 48.6
  Top Layer w0.508: v1(39.116,8.128) 40.038,9.05 R20.1 R19.1
  Bottom Layer w0.508: v1(39.116,8.128) 41.148,10.16 44.704,10.16 52.324,17.78 52.324,28.702 54.102,30.48 58.928,30.48 63.57,35.122 P4.1
NetP4_2: P4.2 R18.1 R21.1 | length 49.3
  Top Layer w0.508: R18.1 R21.1 46.319,9.05 46.413,9.144 v1(46.482,9.144)
  Bottom Layer w0.508: v1(46.482,9.144) 46.99,9.652 50.292,12.954 59.182,12.954 62.738,16.51 62.738,33.02 64.951,35.233 64.951,39.37 63.74,39.37 P4.2
NetP4_3: P4.3 U1.22 | length 44.1
  Top Layer w0.254: U1.22 35.75,32.576 36.83,31.496 41.656,31.496 42.926,32.766 v1(65.532,32.766)
  Bottom Layer w0.254: P4.3 65.532,40.118 v1(65.532,32.766)
NetP4_4: P4.4 U1.23 | length 46.2
  Top Layer w0.254: U1.23 36.25,33.092 37.084,32.258 41.402,32.258 42.672,33.528 v1(66.548,33.528)
  Bottom Layer w0.254: P4.4 66.548,41.642 v1(66.548,33.528)
NetP4_5: P4.5 U1.24 | length 45.9
  Top Layer w0.254: U1.24 36.75,33.354 37.084,33.02 41.148,33.02 43.18,35.052 65.024,35.052 65.532,35.56 65.532,47.011 65.383,47.16 P4.5
NetP4_13: P4.13 U1.38 | length 40.9
  Top Layer w0.254: U1.38 36.25,57.078 43.942,64.77 60.86,64.77 P4.13
NetP4_14: P4.14 U1.37 | length 38.6
  Top Layer w0.254: U1.37 36.75,55.8 43.18,62.23 60.86,62.23 P4.14
NetP4_15: P4.15 U1.34 | length 30.3
  Top Layer w0.254: U1.34 42.512,41.75 60.622,59.86 P4.15
NetP4_16: P4.16 U1.33 | length 29.5
  Top Layer w0.254: U1.33 44.96,41.25 P4.16
NetP4_17: P4.17 U1.32 | length 28.6
  Top Layer w0.254: U1.32 46.846,40.75 60.876,54.78 P4.17
NetP4_18: P4.18 U1.31 | length 27.8
  Top Layer w0.254: U1.31 49.04,40.25 P4.18
NetP4_19: P4.19 U1.30 | length 27.2
  Top Layer w0.254: U1.30 38.617,39.75 38.64,39.727 38.64,39.71 51.394,39.71 61.03,49.346 P4.19
NetP4_20: P4.20 U1.29 | length 26.1
  Top Layer w0.254: U1.29 38.325,39.25 38.348,39.227 38.348,39.213 53.083,39.213 P4.20
NetP4_21: P4.21 U1.28 | length 25.3
  Top Layer w0.254: U1.28 55.16,38.75 P4.21
NetP4_22: P4.22 U1.27 | length 24.4
  Top Layer w0.254: U1.27 38.331,38.25 38.354,38.227 38.377,38.25 57.2,38.25 P4.22
NetP4_23: P4.23 U1.26 | length 23.6
  Top Layer w0.254: U1.26 59.24,37.75 P4.23
NetP4_24: P4.24 U1.25 | length 22.9
  Top Layer w0.254: U1.25 60.78,37.25 P4.24
NetP5_2: P5.2 U1.35 | length 31.4
  Top Layer w0.254: U1.35 41.488,42.25 53.34,54.102 v1(53.34,55.626)
  Bottom Layer w0.254: P5.2 46.482,58.898 46.482,56.388 47.244,55.626 v1(53.34,55.626)
NetP5_4: P5.4 U1.36 | length 23.2
  Top Layer w0.254: U1.36 40.718,42.75 51.46,53.492 P5.4
NetR1_2: R1.2 U1.2 | length 32.1
  Top Layer w0.254: R1.2 10.096,56.134 v1(13.97,56.134) ; v1(20.32,55.88) 20.32,44.704 22.774,42.25 U1.2
  Bottom Layer w0.254: v1(13.97,56.134) 20.066,56.134 v1(20.32,55.88)
NetR2_2: R2.2 U1.3 | length 30.1
  Top Layer w0.254: R2.2 10.128,53.848 10.382,53.594 v1(14.224,53.594) ; v1(18.796,53.848) 18.796,45.212 22.258,41.75 U1.3
  Bottom Layer w0.254: v1(14.224,53.594) 18.542,53.594 v1(18.796,53.848)
NetR3_1: R3.1 U1.8 | length 19
  Top Layer w0.254: R3.1 18.122,41.822 20.694,39.25 U1.8
NetR4_1: R4.1 U1.9 | length 18.8
  Top Layer w0.254: R4.1 18.536,36.57 20.716,38.75 U1.9
VCC: C1.2 C2.2 C8.2 C11.2 C12.1 D2.1 J1.1 P2.2 P3.1 P5.1 R6.2 R7.2 R8.2 R9.2 R10.2 R11.2 R12.2 R13.2 R14.2 R15.2 R16.2 R17.2 U1.6 VR1.2 VR1.4 | length 265.4
  Top Layer w0.254: P3.1 J1.1 ; R17.2 11.366,64.834 16.764,59.436 16.764,45.212 21.726,40.25 U1.6
  Top Layer w0.508: R17.2 R16.2 R15.2 R14.2 R13.2 R12.2 11.366,77.66 11.938,78.232 51.308,78.232 51.774,77.766 R11.2 R10.2 R9.2 R8.2 R7.2 R6.2 51.78,66.022 53.978,66.022 v1(54,66) ; v1(20.574,8.128) 20.607,8.095 20.607,6.221 D2.1 20.698,6.245 24.767,6.245 P2.2 ; C8.2 33.443,23.076 35.733,23.076 C2.2 35.775,23.034 37.883,23.034 C11.2 37.923,22.994 42.044,22.994 42.926,23.876 42.926,28.702 43.224,29 C12.1 VR1.2 VR1.4 44.824,13.157 44.958,13.023 v1(44.958,12.954)
  Bottom Layer w0.508: P3.1 4.316,6.856 5.588,8.128 v1(20.574,8.128) ; P2.2 20.066,11.06 20.066,17.526 22.86,20.32 35.814,20.32 37.592,18.542 37.592,12.954 39.116,11.43 43.434,11.43 v1(44.958,12.954) ; C12.1 44.824,34.17 43.84,35.154 P5.1 43.84,59.55 44.286,59.996 44.836,59.996 50.84,66 v1(54,66)
pads on no net: P4.6 P4.7 P4.8 P4.9 P4.10 P4.11 P4.12 U1.5
copper on no net:
  other v2: 32.38,16.762 63.332,74.73 4.19,74.746

## Polygon pours and split planes (outlines as drawn)
BGND on Bottom Layer "BGND_L02_P001" (solid, pour order 1): 0,3.048 ccw(c3.048,3.048) 3.048,0 65.5,0 ccw(c65.5,3) 68.5,3 68.5,4.064 68.5,75.438 68.559,76.941 ccw(c65.5,76.941) 65.5,80 64.516,80 3.048,80 ccw(c3.048,76.952) 0,76.952
VCC on Top Layer "VCC_L01_P000" (solid, pour order 0): 68.5,3.048 68.5,3 cw(c65.5,3) 65.5,0 3.048,0 cw(c3.048,3.048) 0,3.048 0,76.962 cw(c3.043,76.957) 3.048,80 65.532,80.01 cw(c65.532,77.042) 68.5,77.042

## Silkscreen, mask and mechanical layers (free items; w line width, h text height)
Top Overlay:
  circle w0.254: c32.38,16.762 r2.908
  circle w0.254: c63.332,74.73 r3.18
  circle w0.254: c4.19,74.746 r2.896
Mechanical 1:
  lines w0.254: 0,3 ccw(c3,3) 3,0 65.5,0 ccw(c65.5,3) 68.5,3 68.5,77 ccw(c65.5,77) 65.5,80 3,80 ccw(c3,77) 0,77 0,76.5 0,3